# Altium PCB PA_F - Copy.PcbDoc
Units mil, origin at the board's own origin, x right, y up, seen from the top; angles counter-clockwise.
Board outline 3550 x 2000 mil, 2 copper layers (Top Layer, Bottom Layer); 19 components, 16 nets, 49 pads, 58 vias.
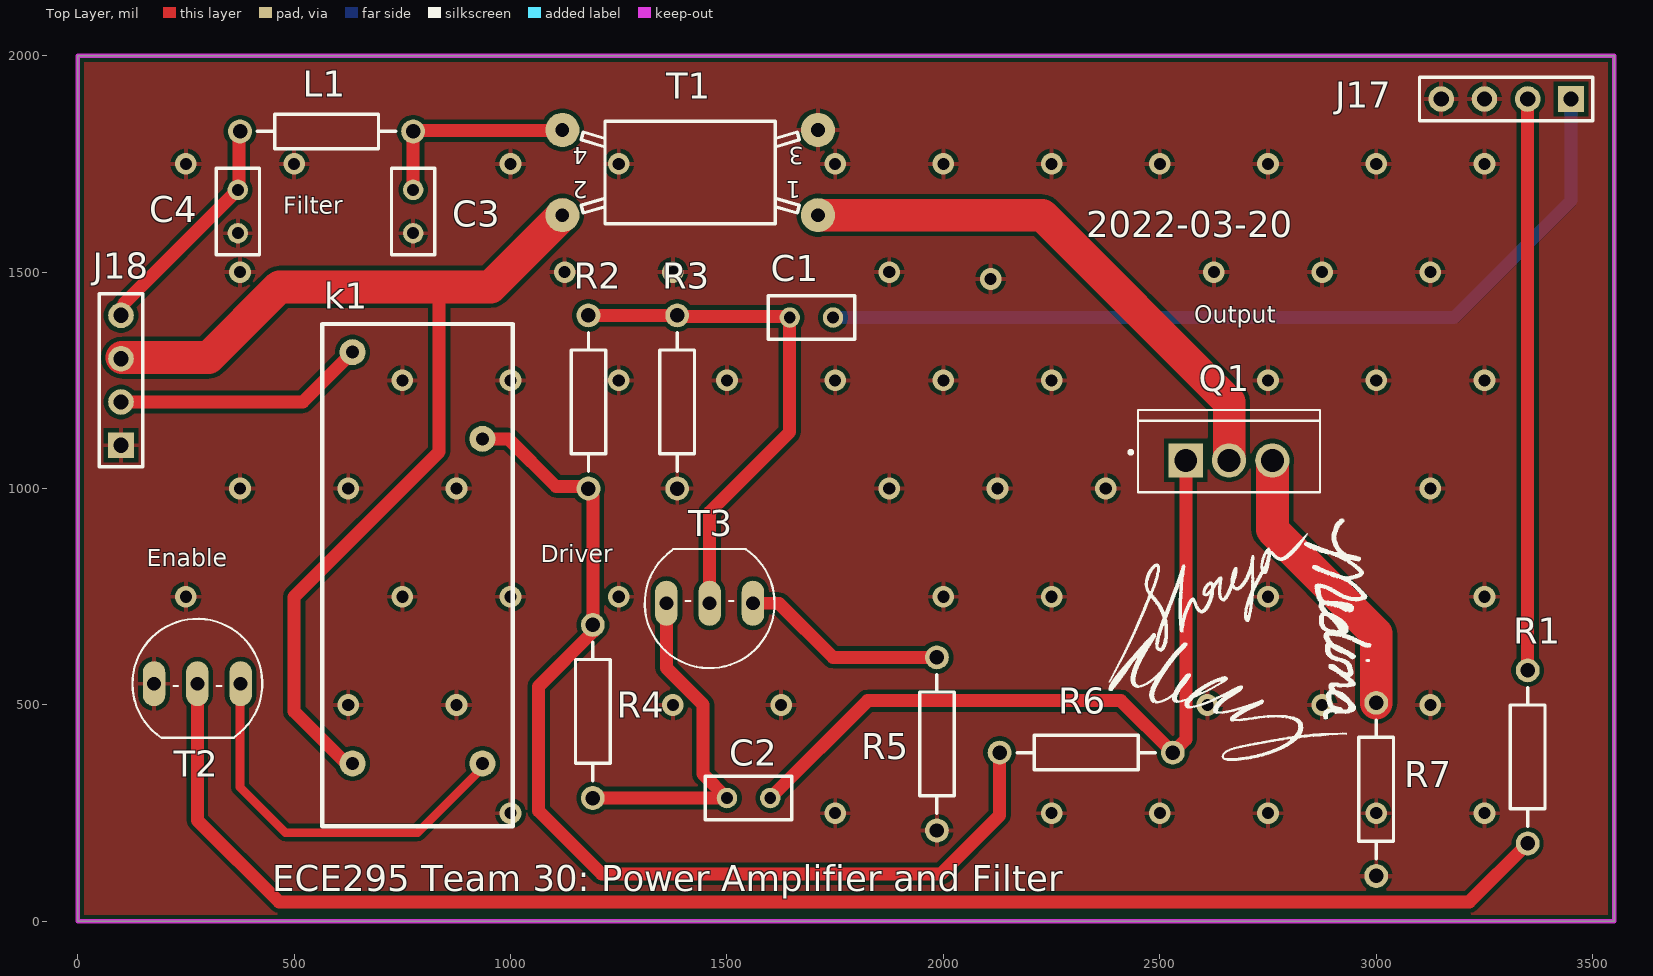
[diagram p0: Top Layer view]
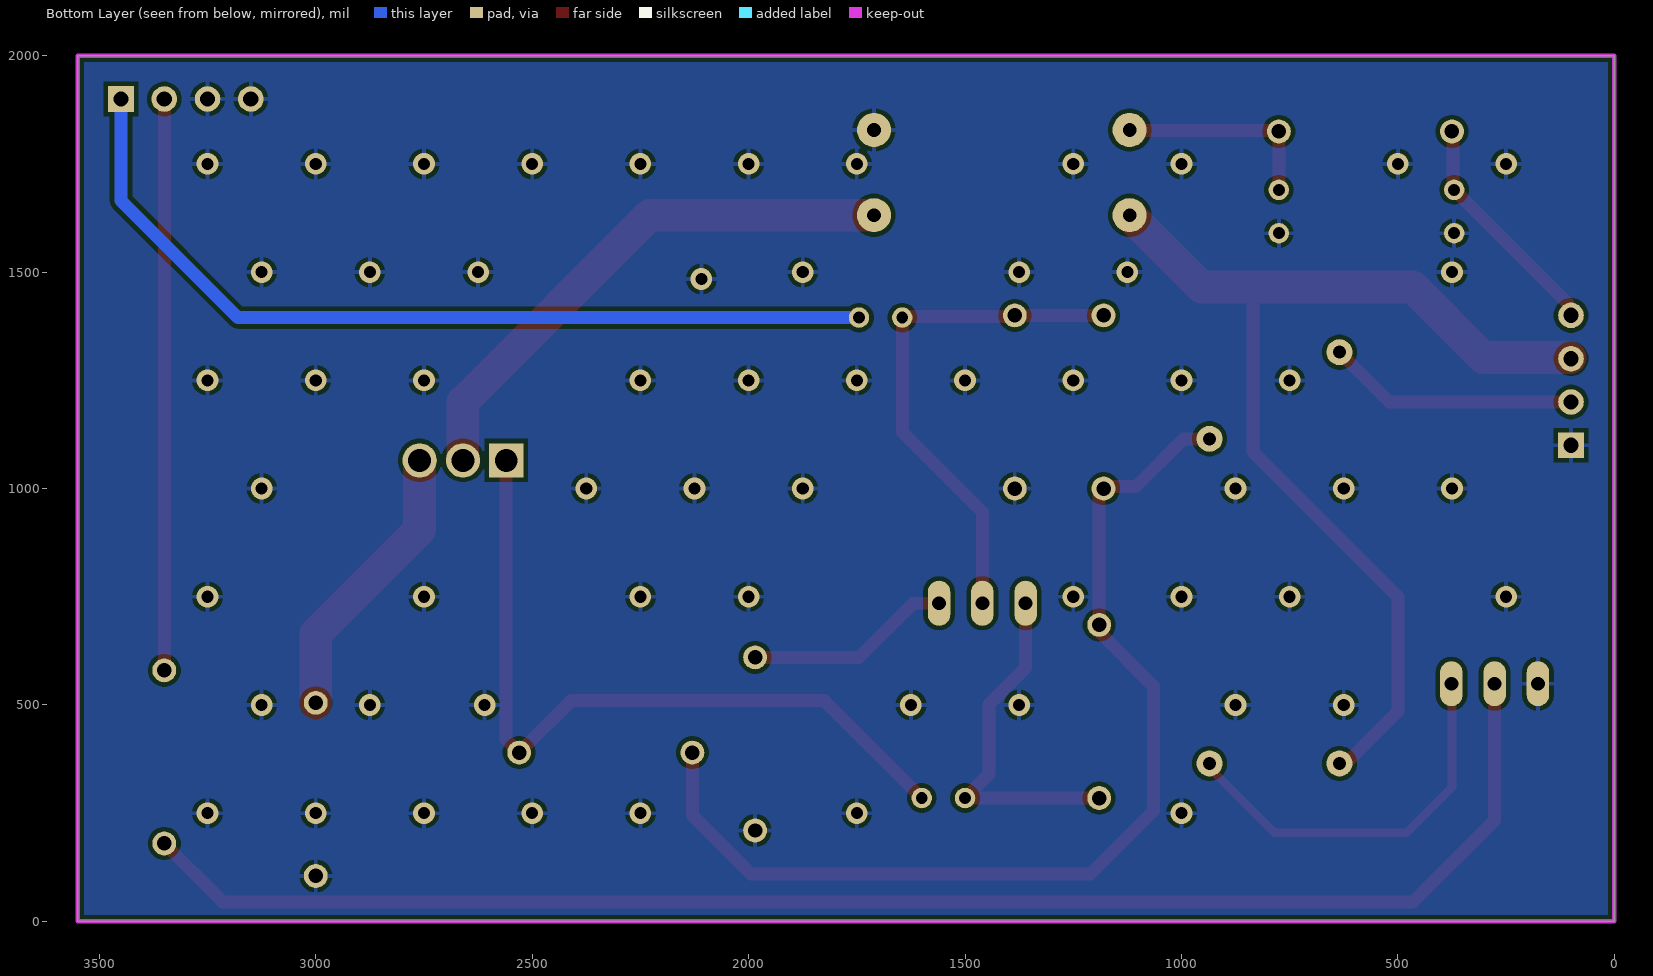
[diagram p1: Bottom Layer view, seen from below]

## Layer stack, top to bottom
Top Solder: solder mask 0.4, Solder Resist, Dk 3.5
Top Layer: signal copper 1.4
Dielectric 1: dielectric 12.6, FR-4, Dk 4.8
Bottom Layer: signal copper 1.4
Bottom Solder: solder mask 0.4, Solder Resist, Dk 3.5

## Board outline
0,0 3550,0 3550,2000 0,2000

## Design rules (kind name [scope] priority, off if disabled: settings)
Clearance [All] p1: gap=10 ignorepadtopadclearanceinfootprint=FALSE except(0: Arc-Hole Track-Hole SMDPad-Hole THPad-Hole Via-Hole Fill-Hole Poly-Hole Region-Hole Text-Hole)
Height [All] p1: minheight=0 maxheight=2000 prefheight=500
HoleSize [All] p1: absolutevalues=TRUE maxlimit=900 minlimit=12 maxpercent=80.000 minpercent=20.000
MinimumSolderMaskSliver [All] p1: minsoldermaskwidth=1
PolygonConnect [All] p1: connectstyle=Relief reliefconductorwidth=10 reliefentries=4 polygonreliefangle="90 Angle" airgapwidth=10
RoutingVias [All] p1: holewidth=12 width=24 viastyle="Through Hole" minholewidth=12 minwidth=24 maxholewidth=100 maxwidth=200
SilkToSilkClearance [All] p1: silktosilkclearance=0
SilkToSolderMaskClearance [IsPad] p1: minsilkscreentomaskgap=1 clearancetoexposedcopper=TRUE
SolderMaskExpansion [All] p1: expansion=4 istentingtop=FALSE
Width [All] p1: maxlimit=200 minlimit=10 preferedwidth=30 minimp=50.000000 maximp=50.000000 favimp=50.000000
25 further rules are at their usual default settings.

## Classes and differential pairs
component class milestone1: C1 C2 C3 C4 J17 k1 L1 Q1 R2 R3 R4 R5 R7 T1 T2 T3

## Components (designator, comment, footprint, x,y, rotation, side; value= is the part's Value field where it differs from the comment)
C1 "Capacitor 5" rad-0.1 1695,1395 r180 top value=1u
C2 "Capacitor 4" rad-0.1 1550,285 r0 top value=1u
C3 "Capacitor 1" rad-0.1 775,1640 r90 top value=200p
C4 "Capacitor 2" rad-0.1 370,1640 r90 top value=200p
J17 "Header 4" HDR1X4 3450,1900 r180 top (schematic designator P2)
J18 "Header 4" HDR1X4 100,1100 r90 top (schematic designator P1)
k1 "Relay-SPST" PCBComponent_1 635,365 r90 top
L1 "Inductor" AXIAL-0.4 575,1825 r180 top value=560n
Q1 "MOSFET-N" TO254P1067X483X3124-3P 2560,1065 r0 top (schematic designator C)
R1 "Resistor 3" AXIAL-0.4 3350,380 r90 top value=3.3K
R2 "Resistor 3" AXIAL-0.4 1180,1200 r270 top value=3K
R3 "Resistor 5" AXIAL-0.4 1385,1200 r90 top value=3K
R4 "Resistor 8" AXIAL-0.4 1190,485 r90 top value=8
R5 "Resistor 6" AXIAL-0.4 1985,410 r90 top value=3.5
R6 "Resistor 2" AXIAL-0.4 2330,390 r180 top value=4000
R7 "Resistor 7" AXIAL-0.4 3000,305 r90 top value=1
T1 "467TO5000" TRANS 1415,1730 r180 top
T2 "2N2222" TO92-EBC-OVAL 276.45,599.16 r0 top
T3 "2N2222" TO92-EBC-OVAL 1460,685 r180 top

## Footprints (in the part's own frame and the unit in brackets; to place one, negate y for a bottom-side part, rotate by r counter-clockwise, add the part's x,y. Pads: shape width x height; smd on the part's side, far side on the other; paste and mask are expansions set on the pad)
AXIAL-0.4 [mm] "Axial Device, Thru-Hole; 2 Leads; 0.4 in Pin Spacing"
  round 1.4 hole 0.85: 1(-5.08,0) 2(5.08,0)
  silkscreen extent -4.06,-1.02 4.06,1.02
HDR1X4 [mm] "Connector; Header; 4 Position"
  rect 1.5x1.5 hole 0.9: 1(0,0)
  round 1.5 hole 0.9: 2(2.54,0) 3(5.08,0) 4(7.62,0)
  silkscreen extent -1.27,-1.27 8.89,1.27
PCBComponent_1 [mil]
  round 60 hole 30: 11(950,0) 12(750,-300) A1(0,0) A2(0,-300)
  silkscreen extent -145,-370 1015,70, body extent -125,-349 997,49, height 484
rad-0.1 [mm] "Radial Cap, Thru-Hole; 2 Leads; 0.1 in Pin Spacing"
  round 1.2 hole 0.7: 1(-1.27,0) 2(1.27,0)
  silkscreen extent -2.54,-1.27 2.54,1.27
TO92-EBC-OVAL [mil]
  oval 52x104 hole 32: B(0,-50) C(100,-50) E(-100,-50)
  silkscreen extent -150,-175 150,100, body extent -129,-114 114,129, height 709
TO254P1067X483X3124-3P [mm]
  rect 2.01x2.01 hole 1.34: 1(0,0)
  round 2.01 hole 1.34: 2(2.54,0) 3(5.08,0)
  silkscreen extent -3.33,-1.87 7.88,2.96, body extent -18.41,-9.27 23.49,16.13, height 47.75
TRANS [mm] "Transformer; 4 Leads"
  round 2 hole 0.8: 1(-7.5,2.5) 2(7.5,2.5) 3(-7.5,-2.5) 4(7.5,-2.5)
  silkscreen extent -6.4,-3 6.4,3

## Part data
C1: library part Capacitor, "Alum. Electrolytic Cap 1µF 50V 5mm Radial WCAP-ATG5 Series Lifetime 2000h +105°C", Capacitance=10mF, Case/Package=Radial, ESR (Equivalent Series Resistance)=56mR, Manufacturer="CDE Illinois Capacitor", Manufacturer Part Number=109CKS016M, Max Operating Temperature=85°C, Min Operating Temperature=-40°C, Package Quantity=50, Ripple Current=3.23A, Tolerance=20%, Voltage Rating=16V, Category="Aluminum Electrolytic Capacitors", ComponentLink1Description=https://datasheet.ciiva.com/16322/ckr-cks-16322429.pdf?src-supplier=Future+Electronics, ComponentLink1URL=https://datasheet.ciiva.com/16322/ckr-cks-16322429.pdf?src-supplier=Future+Electronics, ComponentLink2Description=https://datasheet.ciiva.com/14591/70111676-14591656.pdf?src-supplier=Allied+Electronics, ComponentLink2URL=https://datasheet.ciiva.com/14591/70111676-14591656.pdf?src-supplier=Allied+Electronics, ComponentLink3Description=http://www.farnell.com/datasheets/1879647.pdf?src-supplier=Farnell, ComponentLink3URL=http://www.farnell.com/datasheets/1879647.pdf?src-supplier=Farnell, ComponentLink4Description=http://katalog.we-online.de/pbs/datasheet/860020672005.pdf?src-supplier=Digi-Key, ComponentLink4URL=http://katalog.we-online.de/pbs/datasheet/860020672005.pdf?src-supplier=Digi-Key, ComponentLink5Description=https://katalog.we-online.de/pbs/datasheet/860020672005.pdf?src-supplier=Digi-Key, ComponentLink5URL=https://katalog.we-online.de/pbs/datasheet/860020672005.pdf?src-supplier=Digi-Key, ComponentLink6Description=http://www.farnell.com/datasheets/1879647.pdf?src-supplier=Element14, ComponentLink6URL=http://www.farnell.com/datasheets/1879647.pdf?src-supplier=Element14, Diameter=0.5mm, Dissipation Factor=0.34%, Height=35.5mm, Height - Seated (Max)=1.437inch, Lead Free="Lead Free", Lead Length=15mm, Lead Pitch=0.295inch, Length=1.4inch, Life (Hours)=2000Hour, Mount="Through Hole,PCB", Packaging=Bulk, Polarity=Polar, Pricing 1="1=2.76000, 10=2.23600, 50=1.95140, 100=1.70740, 500=1.30088, 1000=1.13827, 2500=1.09762, 5000=1.06050 (USD)", Pricing 2="50=0.09200, 250=0.06600, 500=0.05200, 1000=0.05000 (USD)", REACH SVHC=Unknown, RoHS=Yes, RoHS Compliant=Yes, Series=CKS, SimulationGenericComponent=True, Stock 1=433, Stock 2=1, Supplier 1=Digi-Key, Supplier 2=RSComponents, Supplier Part Number 2=8396618, Termination="Through Hole", Voltage Rating (DC)=16V
C2: library part Capacitor, "Alum. Electrolytic Cap 1µF 50V 5mm Radial WCAP-ATG5 Series Lifetime 2000h +105°C", Capacitance=1uF, Case/Package=Radial, Manufacturer="Wurth Electronics", Manufacturer Part Number=860020672005, Max Operating Temperature=105°C, Min Operating Temperature=-40°C, Package Quantity=2000, Ripple Current=13mA, Supplier Part Number 1=8396618, Tolerance=20%, Voltage Rating=50V, Category="Aluminum Electrolytic Capacitors", ComponentLink1Description=http://www.farnell.com/datasheets/1879647.pdf?src-supplier=Farnell, ComponentLink1URL=http://www.farnell.com/datasheets/1879647.pdf?src-supplier=Farnell, ComponentLink2Description=http://katalog.we-online.de/pbs/datasheet/860020672005.pdf?src-supplier=Digi-Key, ComponentLink2URL=http://katalog.we-online.de/pbs/datasheet/860020672005.pdf?src-supplier=Digi-Key, ComponentLink3Description=https://katalog.we-online.de/pbs/datasheet/860020672005.pdf?src-supplier=Digi-Key, ComponentLink3URL=https://katalog.we-online.de/pbs/datasheet/860020672005.pdf?src-supplier=Digi-Key, ComponentLink4Description=http://www.farnell.com/datasheets/1879647.pdf?src-supplier=Element14, ComponentLink4URL=http://www.farnell.com/datasheets/1879647.pdf?src-supplier=Element14, Diameter=5mm, Height=11mm, Height - Seated (Max)=0.492inch, Lead Pitch=0.079inch, Life (Hours)=2000Hour, Mount="Through Hole", Packaging="Tape and Reel", Polarity=Polar, Pricing 1="50=0.09200, 250=0.06600, 500=0.05200, 1000=0.05000 (USD)", REACH SVHC=Unknown, RoHS=Yes, RoHS Compliant=Yes, SimulationGenericComponent=True, Stock 1=1, Supplier 1=RSComponents, Voltage Rating (DC)=50V
C3 C4: library part Capacitor, "Capacitor Multi-layer Ceramic 200pF 5% 250V 2-Pin Through Hole Bulk", Manufacturer=KEMET, Manufacturer Part Number=C326C201JAG5TA, Supplier Part Number 1=C326C201JAG5TA-ND, Category="Ceramic Capacitors", Pricing 1="1=0.43000, 10=0.30000, 50=0.21020, 100=0.18020, 500=0.13514, 1000=0.11411, 2500=0.10811, 5000=0.10210 (USD)", RoHS=Yes, RoHS Compliant=Yes, SimulationGenericComponent=True, Stock 1=1712, Supplier 1=Digi-Key
J17 J18: "Header, 4-Pin", LatestRevisionDate=17-Jul-2002, LatestRevisionNote="Re-released for DXP Platform.", Publisher="Altium Limited"
k1: "Single-Pole Single-Throw Relay", LatestRevisionDate=17-Jul-2002, LatestRevisionNote="Re-released for DXP Platform.", PackageReference=MODULE4, Published=24-Mar-1999, Publisher="Altium Limited"
Q1: "IRF510PBF N-channel MOSFET Transistor; 5.6 A; 100 V; 3-Pin TO-220AB", Case/Package=TO-220AB, Continuous Drain Current (ID)=5.6A, Drain to Source Breakdown Voltage=100V, Drain to Source Resistance=540mR, Gate to Source Voltage (Vgs)=20V, Input Capacitance=180pF, Manufacturer=Vishay, Manufacturer Part Number=IRF510PBF, Max Operating Temperature=175°C, Max Power Dissipation=43W, Min Operating Temperature=-55°C, Package Quantity=50, Supplier Part Number 1=7085134P, Threshold Voltage=4V, Category=MOSFETs, ComponentLink1Description=https://datasheet.ciiva.com/8114/sihf510-8114656.pdf?src-supplier=Avnet, ComponentLink1URL=https://datasheet.ciiva.com/8114/sihf510-8114656.pdf?src-supplier=Avnet, ComponentLink2Description=https://datasheet.ciiva.com/14110/chirf510-data-en-14110759.pdf?src-supplier=Distrelec, ComponentLink2URL=https://datasheet.ciiva.com/14110/chirf510-data-en-14110759.pdf?src-supplier=Distrelec, ComponentLink3Description=https://datasheet.ciiva.com/15137/getdatasheetpartid-84718-15137579.pdf?src-supplier=Verical, ComponentLink3URL=https://datasheet.ciiva.com/15137/getdatasheetpartid-84718-15137579.pdf?src-supplier=Verical, ComponentLink4Description=https://datasheet.ciiva.com/933/sihf510-933818.pdf?src-supplier=Digi-Key, ComponentLink4URL=https://datasheet.ciiva.com/933/sihf510-933818.pdf?src-supplier=Digi-Key, ComponentLink5Description=https://datasheet.ciiva.com/18432/70078850-18432459.pdf?src-supplier=Allied+Electronics, ComponentLink5URL=https://datasheet.ciiva.com/18432/70078850-18432459.pdf?src-supplier=Allied+Electronics, Contact Plating=Tin,Matte, Current Rating=5.6A, Drain to Source Voltage (Vdss)=100V, Drain-source On Resistance-Max=540mR, Element Configuration=Single, Fall Time=9.4ns, Height=9.01mm, LatestRevisionDate=17-Jul-2002, LatestRevisionNote="Re-released for DXP Platform.", Lead Free="Lead Free", Length=10.41mm, Mount="Through Hole", Nominal Vgs=4V, Number of Channels=1, Number of Elements=1, Number of Pins=3, On-State Resistance=540mR, PackageDescription="TO, Flat Index; 3 In-Line, Axial Leads; Body Dia. 4.6mm; Lead Dia. 0.5 mm (max)", PackageReference=E3, PackageVersion=1995/1996, Packaging=Rail/Tube, Polarity=N-CHANNEL, Polarization=N, Power Dissipation=43W, Pricing 1="10=1.10000, 100=0.68800, 250=0.64700, 1000=0.50100 (USD)", Published=8-Jun-2000, Publisher="Altium Limited", Radiation Hardening=No, Rds On Max=540mR, REACH SVHC=Unknown, Recovery Time=200ns, Rise Time=16ns, RoHS=Yes, RoHS Compliant=Yes, Stock 1=1, Supplier 1=RSComponents, Turn-Off Delay Time=15ns, Turn-On Delay Time=6.9ns, Voltage Rating (DC)=100V, Weight=0.211644oz, Width=4.7mm
R1 R2 R3: library part Resistor, "Res Wirewound 3K Ohm 5% 5W ±30ppm/°C Ceramic Hi Temp Sil AXL Thru-Hole Bulk", Case/Package=Axial, Manufacturer="Vishay BCcomponents", Manufacturer Part Number=MBA02040C3001FC100, Max Operating Temperature=155°C, Max Power Dissipation=400mW, Min Operating Temperature=-55°C, Package Quantity=1, Resistance=3kR, Resistor Type="Thin Film", Temperature Coefficient=50ppm/°C, Tolerance=1%, Category="Through-Hole Resistors", ComponentLink1Description=http://www.alliedelec.com/m/d/72a9b4b9281933b6a3b8fa3f9583e3eb.pdf?src-supplier=Allied+Electronics, ComponentLink1URL=http://www.alliedelec.com/m/d/72a9b4b9281933b6a3b8fa3f9583e3eb.pdf?src-supplier=Allied+Electronics, ComponentLink2Description=http://uk.rs-online.com/webdocs/09bb/0900766b809bb010.pdf?src-supplier=RSComponents, ComponentLink2URL=http://uk.rs-online.com/webdocs/09bb/0900766b809bb010.pdf?src-supplier=RSComponents, ComponentLink3Description=http://components.arrow.com/part/dataview/0323_01833110?src-supplier=Arrow+Europe, ComponentLink3URL=http://components.arrow.com/part/dataview/0323_01833110?src-supplier=Arrow+Europe, ComponentLink4Description=http://www.vishay.com/docs/28766/28766.pdf?src-supplier=Avnet, ComponentLink4URL=http://www.vishay.com/docs/28766/28766.pdf?src-supplier=Avnet, ComponentLink5Description=http://www.vishay.com/docs/28766/mbxsma.pdf?src-supplier=Digi-Key, ComponentLink5URL=http://www.vishay.com/docs/28766/mbxsma.pdf?src-supplier=Digi-Key, ComponentLink6Description=http://www.vishay.com/docs/28766/28766.pdf?src-supplier=Avnet+Europe, ComponentLink6URL=http://www.vishay.com/docs/28766/28766.pdf?src-supplier=Avnet+Europe, ComponentLink7Description=https://datasheet.ciiva.com/2723/alsralvr-2723471.pdf?src-supplier=Digi-Key, ComponentLink7URL=https://datasheet.ciiva.com/2723/alsralvr-2723471.pdf?src-supplier=Digi-Key, ComponentLink8Description=https://datasheet.ciiva.com/8837/alsralvr-8837660.pdf?src-supplier=Avnet, ComponentLink8URL=https://datasheet.ciiva.com/8837/alsralvr-8837660.pdf?src-supplier=Avnet, Construction=Cylindrical, Contact Plating=Tin, Diameter=1.6mm, Features="Automotive AEC-Q200", Lead Free="Lead Free", Lead Length=38.1mm, Length=3.6mm, Military Standard=Not, Mount="Through Hole", Number of Terminations=2, Packaging="Tape and Reel", Power Rating=400mW, Pricing 1="100=0.13400, 500=0.12500, 1000=0.11500, 2500=0.10600, 5000=0.09200 (USD)", Pricing 2="1=1.57000, 10=1.38900, 25=1.28760, 50=1.21200, 100=1.06050, 250=0.90900, 500=0.75750, 1000=0.65650, 5000=0.63630 (USD)", Radiation Hardening=No, RoHS=Yes, RoHS Compliant=Yes, Series="MBA 0204 - Professional", SimulationGenericComponent=True, Stock 1=1, Stock 2=53, Supplier 1=RSComponents, Supplier 2=Digi-Key, TC1=0, TC2=0, Termination=Axial, Width=7.92mm
  R1 R2: Supplier Part Number 2=ALSR5J-3.0K-ND
  R3: Pricing 3="1=1.57000, 10=1.38900, 25=1.28760, 50=1.21200, 100=1.06050, 250=0.90900, 500=0.75750, 1000=0.65650, 5000=0.63630 (USD)", Stock 3=53, Supplier 3=Digi-Key, Supplier Part Number 3=ALSR5J-3.0K-ND
R4: library part Resistor, "Resistor; Wirewound; Res 33 Ohms; Pwr-Rtg 5 W; Tol 1%; Axial; Silicone-Ceramic", Case/Package=Axial, Manufacturer=Piher, Manufacturer Part Number=N6S25T0C-504-3030, Max Operating Temperature=275°C, Max Power Dissipation=5W, Min Operating Temperature=25°C, Package Quantity=25, Resistance=33R, Resistance Tolerance=1%, Resistor Type=Wirewound, Temperature Coefficient=20ppm/°C, Voltage Rating=460V, Category="Through-Hole Resistors", ComponentLink1Description=https://datasheet.ciiva.com/2762/res-40-2762276.pdf?src-supplier=Digi-Key, ComponentLink1URL=https://datasheet.ciiva.com/2762/res-40-2762276.pdf?src-supplier=Digi-Key, ComponentLink2Description=https://datasheet.ciiva.com/5632/40-series-5632314.pdf?src-supplier=Mouser, ComponentLink2URL=https://datasheet.ciiva.com/5632/40-series-5632314.pdf?src-supplier=Mouser, ComponentLink3Description=https://datasheet.ciiva.com/15771/40-series-15771879.pdf?src-supplier=Onlinecomponents.com, ComponentLink3URL=https://datasheet.ciiva.com/15771/40-series-15771879.pdf?src-supplier=Onlinecomponents.com, ComponentLink4Description=https://datasheet.ciiva.com/16770/70022288-16770455.pdf?src-supplier=Allied+Electronics, ComponentLink4URL=https://datasheet.ciiva.com/16770/70022288-16770455.pdf?src-supplier=Allied+Electronics, Diameter=8.7mm, Lead Free="Lead Free", Length=23.8mm, Mount="Through Hole", Number of Pins=2, Number of Terminations=2, Packaging=Bulk, Power Rating=5W, Pricing 1="1=0.48000, 10=0.44800, 25=0.40000, 50=0.38640, 100=0.35870, 250=0.35184, 500=0.32424, 1000=0.27595, 5000=0.22766 (USD)", Pricing 2="1=1.74000, 10=1.54000, 25=1.42000, 50=1.34000, 100=1.11000, 500=0.81100 (USD)", REACH SVHC=Unknown, RoHS=No, RoHS Compliant=Yes, Series="Ohmicone® 40", SimulationGenericComponent=True, Stock 1=1473, Stock 2=2, Supplier 1=Digi-Key, Supplier 2=Newark, TC1=0, TC2=0, Termination=Axial, Tolerance=1%, Voltage Rating (DC)=460V
R5: library part Resistor, "Res Metal Film 1.5 Ohm 5% 3W ±300ppm/°C Conformal AXL Thru-Hole", Case/Package=Axial, Manufacturer="Vishay Dale", Manufacturer Part Number=RN70C2700BB14, Max Operating Temperature=175°C, Max Power Dissipation=750mW, Min Operating Temperature=-65°C, Package Quantity=1000, Power Rating=500mW, Resistance=270R, Resistance Tolerance=1%, Resistor Type="Metal Film", Temperature Coefficient=50ppm/°C, Tolerance=0.1%, Voltage Rating=500V, Voltage Rating (DC)=350V, Category="Through-Hole Resistors", ComponentLink1Description=https://datasheet.ciiva.com/13978/cmfmil-13978011.pdf?src-supplier=Digi-Key, ComponentLink1URL=https://datasheet.ciiva.com/13978/cmfmil-13978011.pdf?src-supplier=Digi-Key, ComponentLink2Description=https://datasheet.ciiva.com/5491/cmfmil-223788-5491367.pdf?src-supplier=Mouser, ComponentLink2URL=https://datasheet.ciiva.com/5491/cmfmil-223788-5491367.pdf?src-supplier=Mouser, ComponentLink3Description=https://datasheet.ciiva.com/6531/res-wh-wn-6531174.pdf?src-supplier=Digi-Key, ComponentLink3URL=https://datasheet.ciiva.com/6531/res-wh-wn-6531174.pdf?src-supplier=Digi-Key, ComponentLink4Description=https://datasheet.ciiva.com/6531/res-wh-wn-6531177.pdf?src-supplier=Digi-Key, ComponentLink4URL=https://datasheet.ciiva.com/6531/res-wh-wn-6531177.pdf?src-supplier=Digi-Key, ComponentLink5Description=https://datasheet.ciiva.com/5635/res-wh-wn-5635678.pdf?src-supplier=Mouser, ComponentLink5URL=https://datasheet.ciiva.com/5635/res-wh-wn-5635678.pdf?src-supplier=Mouser, ComponentLink6Description=https://datasheet.ciiva.com/46641/70370918-46641144.pdf?src-supplier=Allied+Electronics, ComponentLink6URL=https://datasheet.ciiva.com/46641/70370918-46641144.pdf?src-supplier=Allied+Electronics, ComponentLink7Description=https://datasheet.ciiva.com/8080/whm-wnm-8080265.pdf?src-supplier=Element14, ComponentLink7URL=https://datasheet.ciiva.com/8080/whm-wnm-8080265.pdf?src-supplier=Element14, ComponentLink8Description=https://media.digikey.com/pdf/Data%20Sheets/Panasonic%20Resistors%20Thermistors%20PDFs/ERX_GxS_F_Series.pdf?src-supplier=Digi-Key, ComponentLink8URL=https://media.digikey.com/pdf/Data%20Sheets/Panasonic%20Resistors%20Thermistors%20PDFs/ERX_GxS_F_Series.pdf?src-supplier=Digi-Key, ComponentLink9Description=http://components.arrow.com/part/dataview/43049225S455696N1386?src-supplier=Arrow+Electronics, ComponentLink9URL=http://components.arrow.com/part/dataview/43049225S455696N1386?src-supplier=Arrow+Electronics, ComponentLink10Description=http://www.mouser.com/ds/2/315/panasonic_aoa0000ce18-327359.pdf?src-supplier=Mouser, ComponentLink10URL=http://www.mouser.com/ds/2/315/panasonic_aoa0000ce18-327359.pdf?src-supplier=Mouser, ComponentLink11Description=http://www.onlinecomponents.com/datasheet/erx-3sj1r5a.aspx?p=44474898&src-supplier=Onlinecomponents.com, ComponentLink11URL=http://www.onlinecomponents.com/datasheet/erx-3sj1r5a.aspx?p=44474898&src-supplier=Onlinecomponents.com, ComponentLink12Description=http://industrial.panasonic.com/www-data/pdf/AOA0000/AOA0000CE18.pdf?src-supplier=Avnet, ComponentLink12URL=http://industrial.panasonic.com/www-data/pdf/AOA0000/AOA0000CE18.pdf?src-supplier=Avnet, Construction=Cylindrical, Contact Plating=Tin, Diameter=7.5mm, Features="Moisture Resistant,Military,Flame Retardant Coating", Lead Diameter=1mm, Lead Free="Contains Lead", Length=0.562inch, Military Standard=Not, Mount="Through Hole", Number of Terminations=2, Packaging=Bulk, Pricing 1="1=1.69000, 10=1.49700, 25=1.38800, 50=1.30660, 100=1.14320, 250=0.97992, 500=0.81658, 1000=0.70771, 5000=0.68593 (USD)", Pricing 2="1=1.72000, 10=1.52000, 25=1.38000, 50=1.25000, 100=1.11000, 250=0.93100 (USD)", Pricing 3="1=1.72000, 10=1.52000, 25=1.38000, 50=1.25000, 100=1.11000, 250=0.93100 (USD)", Pricing 4="1500=0.12659, 3000=0.12207 (USD)", Radiation Hardening=No, REACH SVHC=Unknown, RoHS=No, RoHS Compliant=No, Series="Military, MIL-R-10509/3, RN70", SimulationGenericComponent=True, Stock 1=944, Stock 2=72, Stock 3=72, Stock 4=3000, Supplier 1=Digi-Key, Supplier 2=Newark, Supplier 3=Newark, Supplier 4=Digi-Key, TC1=0, TC2=0, Termination=Axial, Weight=0.103oz, Width=4.57mm
R6: library part Resistor, "Resistor, Wirewound, Res 4 Kilohms, Pwr-Rtg 5 W, Tol 5%, Axial, Vitreous Enamel", Case/Package=Axial, Manufacturer=Piher, Manufacturer Part Number=N6S25T0C-504-3030, Max Operating Temperature=150°C, Max Power Dissipation=5W, Min Operating Temperature=-55°C, Package Quantity=1, Resistance=5kR, Resistance Tolerance=1%, Resistor Type=Wirewound, Temperature Coefficient=20ppm/°C, Voltage Rating=330V, Voltage Rating (AC)=4V, Category="Through-Hole Resistors", ComponentLink1Description=https://datasheet.ciiva.com/5635/res-wh-wn-5635721.pdf?src-supplier=Mouser, ComponentLink1URL=https://datasheet.ciiva.com/5635/res-wh-wn-5635721.pdf?src-supplier=Mouser, ComponentLink2Description=https://datasheet.ciiva.com/46365/7whm-wnm-46365913.pdf?src-supplier=Onlinecomponents.com, ComponentLink2URL=https://datasheet.ciiva.com/46365/7whm-wnm-46365913.pdf?src-supplier=Onlinecomponents.com, ComponentLink3Description=https://datasheet.ciiva.com/8080/whm-wnm-8080253.pdf?src-supplier=Element14, ComponentLink3URL=https://datasheet.ciiva.com/8080/whm-wnm-8080253.pdf?src-supplier=Element14, ComponentLink4Description=https://datasheet.ciiva.com/46641/70370918-46641133.pdf?src-supplier=Allied+Electronics, ComponentLink4URL=https://datasheet.ciiva.com/46641/70370918-46641133.pdf?src-supplier=Allied+Electronics, ComponentLink5Description=https://datasheet.ciiva.com/2723/res-20-2723908.pdf?src-supplier=Digi-Key, ComponentLink5URL=https://datasheet.ciiva.com/2723/res-20-2723908.pdf?src-supplier=Digi-Key, ComponentLink6Description=https://datasheet.ciiva.com/5631/20-series-5631871.pdf?src-supplier=Mouser, ComponentLink6URL=https://datasheet.ciiva.com/5631/20-series-5631871.pdf?src-supplier=Mouser, ComponentLink7Description=https://datasheet.ciiva.com/15769/20-series-15769433.pdf?src-supplier=Onlinecomponents.com, ComponentLink7URL=https://datasheet.ciiva.com/15769/20-series-15769433.pdf?src-supplier=Onlinecomponents.com, ComponentLink8Description=https://datasheet.ciiva.com/16722/70022261-16722174.pdf?src-supplier=Allied+Electronics, ComponentLink8URL=https://datasheet.ciiva.com/16722/70022261-16722174.pdf?src-supplier=Allied+Electronics, Diameter=7.5mm, Features="Flame Retardant Coating", Lead Diameter=1mm, Lead Free="Lead Free", Length=20mm, Mount="Through Hole", Number of Pins=2, Number of Terminations=2, Packaging="Tape and Reel", Power Rating=5W, Pricing 1="1=0.48000, 10=0.44800, 25=0.40000, 50=0.38640, 100=0.35870, 250=0.35184, 500=0.32424, 1000=0.27595, 5000=0.22766 (USD)", Pricing 2="1=1.70000, 10=1.52000, 25=1.40000, 50=1.28000, 100=1.16000, 250=0.99000 (USD)", Pricing 3="1=2.48000, 10=2.20000, 25=2.19000, 50=1.93000, 100=1.67000, 500=1.19000 (USD)", REACH SVHC=Unknown, RoHS=No, RoHS Compliant=Yes, Series=WH, SimulationGenericComponent=True, Stock 1=1473, Stock 2=106, Stock 3=6, Supplier 1=Digi-Key, Supplier 2=Newark, Supplier 3=Newark, Supplier Part Number 3=64K8304, TC1=0, TC2=0, Termination=Axial, Tolerance=1%, Voltage Rating (DC)=330V, Weight=0.080848oz
R7: library part Resistor, "Res Wirewound 8K Ohm 5% 5W ±30ppm/°C Ceramic Hi Temp Sil AXL Thru-Hole Bulk", Case/Package=Axial, Manufacturer="Vishay Dale", Manufacturer Part Number=RN55C8001BB14, Max Operating Temperature=175°C, Max Power Dissipation=125mW, Min Operating Temperature=-65°C, Package Quantity=100, Power Rating=100mW, Resistance=8kR, Resistor Type="Metal Film", Temperature Coefficient=50ppm/°C, Tolerance=0.1%, Voltage Rating=200V, Category="Through-Hole Resistors", ComponentLink1Description=https://datasheet.ciiva.com/13962/cmfmil-13962430.pdf?src-supplier=Digi-Key, ComponentLink1URL=https://datasheet.ciiva.com/13962/cmfmil-13962430.pdf?src-supplier=Digi-Key, ComponentLink2Description=https://datasheet.ciiva.com/8799/alsralvr-8799886.pdf?src-supplier=Avnet, ComponentLink2URL=https://datasheet.ciiva.com/8799/alsralvr-8799886.pdf?src-supplier=Avnet, ComponentLink3Description=https://datasheet.ciiva.com/2723/alsralvr-2723452.pdf?src-supplier=Digi-Key, ComponentLink3URL=https://datasheet.ciiva.com/2723/alsralvr-2723452.pdf?src-supplier=Digi-Key, Contact Plating=Tin,Lead, Diameter=2.29mm, Features="Moisture Resistant,Military,Flame Retardant Coating", Lead Diameter=0.64mm, Lead Free="Contains Lead", Lead Length=38.1mm, Length=0.24inch, Military Standard=MIL-R-10509, Mount="Through Hole", Number of Terminations=2, Packaging=Bulk, Pricing 1="1=0.79000, 10=0.69000, 25=0.60640, 50=0.55400, 100=0.48090, 250=0.41816, 500=0.34706, 1000=0.28224, 5000=0.26928 (USD)", Pricing 2="1=1.57000, 10=1.38900, 25=1.28760, 50=1.21200, 100=1.06050, 250=0.90900, 500=0.75750, 1000=0.65650, 5000=0.63630 (USD)", RoHS=No, RoHS Compliant=No, Series="Military, MIL-R-10509/7, RN55", SimulationGenericComponent=True, Stock 1=229, Stock 2=117, Supplier 1=Digi-Key, Supplier 2=Digi-Key, TC1=0, TC2=0, Termination=Axial, Width=2.29mm
T1: library part "Trans Ideal", "Transformer (Ideal)", LatestRevisionDate=17-Jul-2002, LatestRevisionNote="Re-released for DXP Platform.", PackageDescription="Transformer; 4 Leads", PackageReference=TRF_4, Published=8-Jun-2000, Publisher="Altium Limited"
T2 T3: "Bipolar (BJT) Transistor NPN 40V 800mA 300MHz 500mW Through Hole TO-18", Package="TO-18 Central Semiconductor", Availability="In Stock", Check_prices=https://www.snapeda.com/parts/2N2222/Onsemi/view-part/?ref=eda, MF="ON Semiconductor", MP=2N2222, Price=None, Purchase-URL=https://pricing.snapeda.com/search/part/2N2222/?ref=eda, SnapEDA_Link=https://www.snapeda.com/parts/2N2222/Onsemi/view-part/?ref=snap
L1: SimulationGenericComponent=True, Supplier 1=Newark, Supplier 2=Newark, Supplier Part Number 2=63K2915

## Via types
v1: diameter 50, hole 28, Top Layer to Bottom Layer, tented both sides, 58 vias

## Nets (pads, with @x,y where several pads share a name; then routed paths per layer and width w, separated by ;. In a path a pad name is that pad's centre, name@x,y a point inside that pad or via, vN(x,y) a via of type N, cw(c..) or ccw(c..) an arc to the next point about the centre after c; other vN are vias at no path point)
5V: J18.2 k1.11 | length 582.6
  Top Layer w30: J18.2 520,1200 k1.11
GND: C3.1 C4.1 J17.3 J17.4 J18.1 R3.1 R5.1 R7.1 T1.3 T2.E
  other v1: 1000,250 1750,250 2250,250 2500,250 2750,250 3000,250 3250,250 625,500 875,500 1375,500 1625,500 2610,500 2875,500 3125,500 250,750 750,750 1000,750 1250,750 2000,750 2250,750 2750,750 3250,750 375,1000 625,1000 875,1000 1875,1000 2125,1000 2375,1000 3125,1000 750,1250 1000,1250 1250,1250 1500,1250 1750,1250 2000,1250 2250,1250 2750,1250 3000,1250 3250,1250 2109.09,1484.09 375,1500 1125,1500 1375,1500 1875,1500 2625,1500 2875,1500 3125,1500 250,1750 500,1750 1000,1750 1250,1750 1750,1750 2000,1750 2250,1750 2500,1750 2750,1750 3000,1750 3250,1750
NetC1_2: C1.2 R2.1 R3.2 T3.B | length 1203.7
  Top Layer w30: R2.1 1370,1400 1372.5,1397.5 1642.5,1397.5 C1.2 1645,1130.75 1460,945.75 T3.B
NetC2_1: C2.1 R4.1 T3.C | length 813
  Top Layer w30: R4.1@1195,285 C2.1 1445,340 1445,500.71 1360,585.71 T3.C
NetC2_2: C2.2 Q1.1 R6.1 | length 1760.3
  Top Layer w30: C2.2 1825,510 2410,510 R6.1 2530,390.13 2560,420.13 Q1.1
NetC3_2: C3.2 L1.1 T1.4 | length 481.1
  Top Layer w30: C3.2 L1.1 776.71,1826.71 1118.01,1826.71 T1.4
NetC_2: Q1.2 T1.1 | length 1263.5
  Top Layer w75: T1.1 2228.43,1631.57 2660,1200 Q1.2
NetC_3: Q1.3 R7.2 | length 659.4
  Top Layer w76: Q1.3 2760,905 3000,665 R7.2
Netk1_12: k1.12 R2.2 R4.2 R6.2 | length 2401
  Top Layer w30: k1.12 995,1115 1105.19,1004.81 R2.2@1180,1004.81 ; R2.2 1180,993.2 1190,983.2 R4.2 ; R4.2@1190.19,668.4 1065,543.2 1065,255 1210,110 1995,110 2130,245 R6.2
Netk1_A2: k1.A2 T2.C | length 897.7
  Top Layer w20: T2.C@375,549.16 375,310 480,205 785,205 k1.A2@930,350
NetR1_1: R1.1 T2.B | length 3523.2
  Top Layer w30: T2.B 276.45,233.55 465,45 3215,45 R1.1
NetR5_2: R5.2 T3.E | length 476.8
  Top Layer w30: T3.E 1620,735 1745,610 R5.2
PA_IN: C1.1 J17.1 | length 2051.8
  Bottom Layer w30: C1.1 3180,1395 3450,1665 J17.1
PA_OUT: C4.2 J18.4 L1.2 | length 538.9
  Top Layer w30: J18.4 105.56,1405.56 105.56,1425.56 C4.2 372.5,1692.5 372.5,1822.5 L1.2
TX_EN: J17.2 R1.2 | length 1320
  Top Layer w30: R1.2 J17.2
VCC: J18.3 k1.A1 T1.2 | length 2461.6
  Top Layer w20: J18.3 J18.3@102.5,1302.5 ; 302.5,1302.5 305,1305
  Top Layer w30: k1.A1 620,365 500,485 500,750 835,1085 835,1466.03
  Top Layer w76: J18.3@102.5,1302.5 302.5,1302.5 ; 305,1305 466.03,1466.03 835,1466.03 954.18,1466.03 T1.2

## Polygon pours and split planes (outlines as drawn)
GND on Top Layer "GND_L01_P003" (solid, pour order 3): 5,1995 3545,1995 3545,5 5,5
GND on Bottom Layer "GND_L02_P001" (solid, pour order 1): 0,2000 3550,2000 3550,0 0,0

## Keep-outs
Keep-Out Layer:
  the board outline again, w10

## Silkscreen, mask and mechanical layers (free items; w line width, h text height)
Top Overlay:
  drawing of 4 lines, arcs and shapes, not listed
  text "Filter" at 475,1635 h40
  text "2022-03-20" at 2330,1580 h60
  text "Output" at 2580,1383.33 h40
  text "Driver" at 1070,830 h40
  text "Enable" at 160,820 h40
  text "ECE295 Team 30: Power Amplifier and Filter" at 450,69.99 h60

## Text inside footprints (layer, text, board x,y; h text height)
T1: Top Overlay "4" at 1178.78,1789.06 h39.37 r180; Top Overlay "3" at 1677.8,1789.06 h39.37 r180; Top Overlay "2" at 1178.78,1710.32 h39.37 r180; Top Overlay "1" at 1670.91,1710.32 h39.37 r180